# Altium PCB PCB1.PcbDoc
Units mm, origin at the board's own origin, x right, y up, seen from the top; angles counter-clockwise.
Board outline 86.9 x 32.8 mm, 2 copper layers (Top Layer, Bottom Layer); 10 components, 10 nets, 40 pads, 0 vias.
Unrouted connection lines stored in the file: 20.
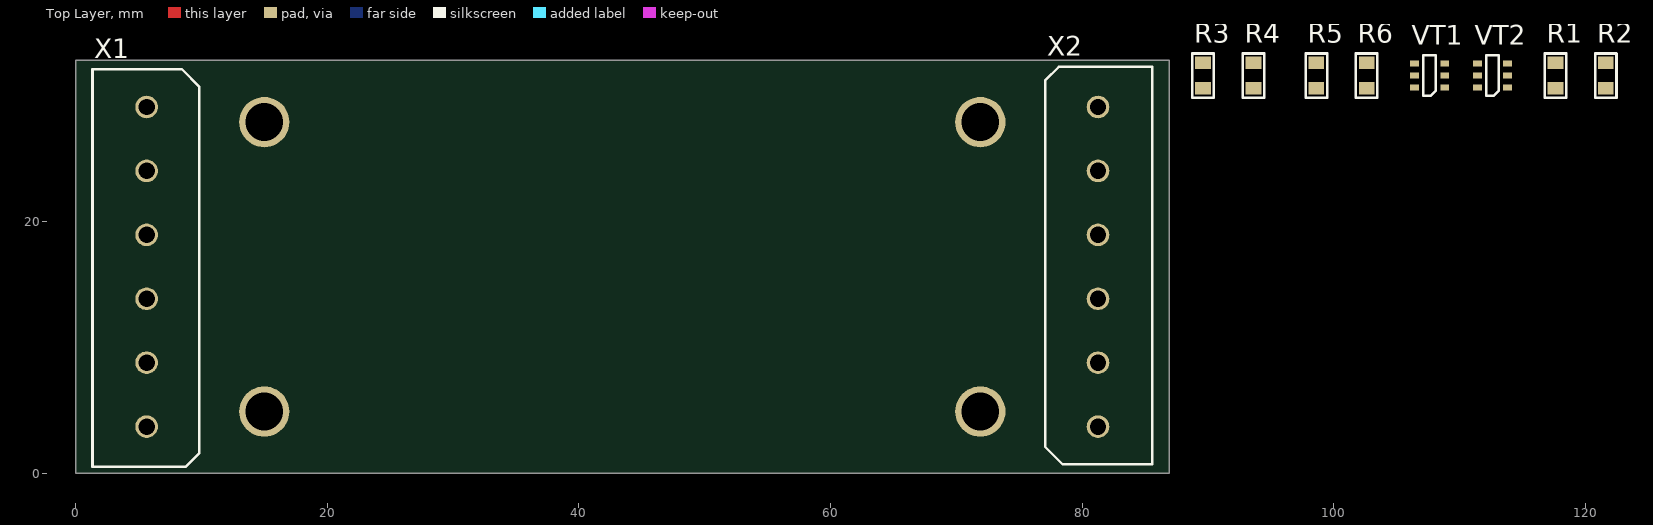
[diagram p0: Top Layer view]
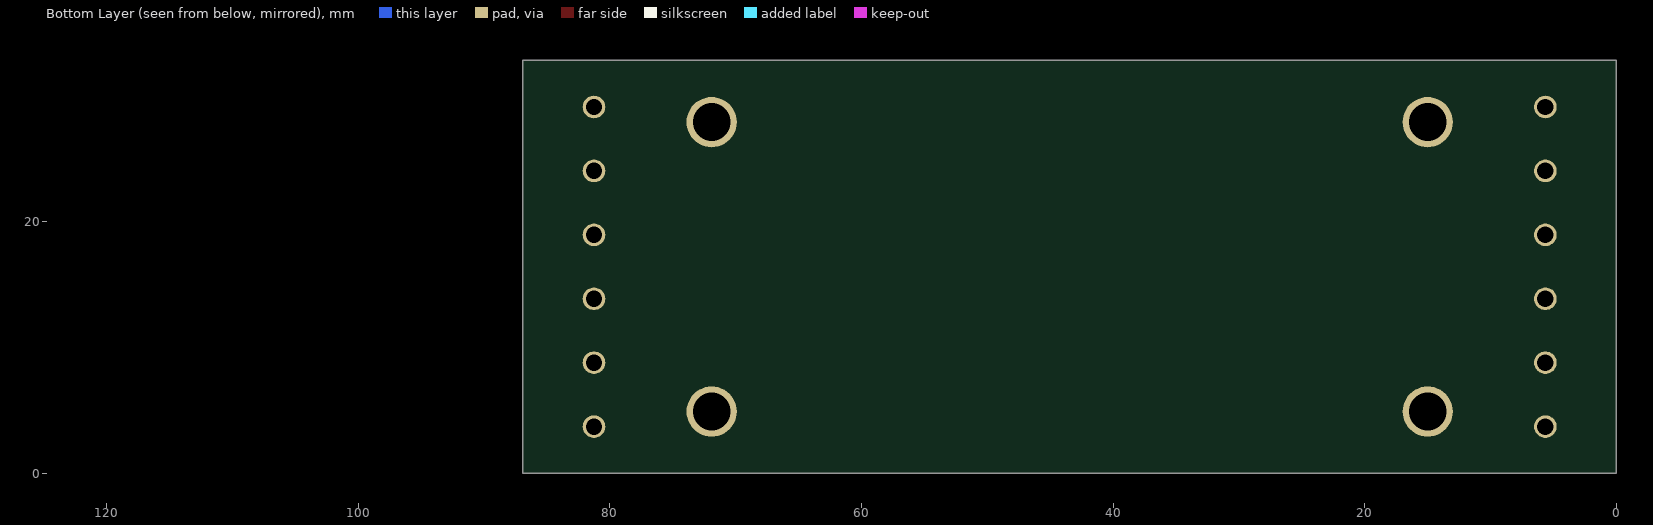
[diagram p1: Bottom Layer view, seen from below]

## Layer stack, top to bottom
Top Solder: solder mask 0.0102, Solder Resist, Dk 3.5
Top Layer: signal copper 0.0356
Dielectric 1: dielectric 0.32, FR-4, Dk 4.8
Bottom Layer: signal copper 0.0356
Bottom Solder: solder mask 0.0102, Solder Resist, Dk 3.5

## Board outline
0,0 86.9,0 86.9,32.8 0,32.8

## Design rules (kind name [scope] priority, off if disabled: settings)
Clearance [All] p1: gap=0.254 ignorepadtopadclearanceinfootprint=FALSE except(0: Arc-Hole Track-Hole SMDPad-Hole THPad-Hole Via-Hole Fill-Hole Poly-Hole Region-Hole Text-Hole)
PolygonConnect [All] p1: connectstyle=Relief reliefconductorwidth=0.254 reliefentries=4 polygonreliefangle="90 Angle" airgapwidth=0.254
RoutingVias [All] p1: holewidth=0.711 width=1.27 viastyle="Through Hole" minholewidth=0.711 minwidth=1.27 maxholewidth=0.711 maxwidth=1.27
SolderMaskExpansion [All] p1: expansion=0.102
Width [All] p1: maxlimit=0.254 minlimit=0.254 preferedwidth=0.254
30 further rules are at their usual default settings.

## Components (designator, comment, footprint, x,y, rotation, side; value= is the part's Value field where it differs from the comment)
R1 "5.6кОм" R0805 117.6,31.6 r90 top
R2 "5.6кОм" R0805 121.6,31.6 r90 top
R3 "4.3кОм" R0805 89.6,31.6 r90 top
R4 "4.3кОм" R0805 93.6,31.6 r90 top
R5 "4.3кОм" R0805 98.6,31.6 r90 top
R6 "4.3кОм" R0805 102.6,31.6 r90 top
VT1 "BC846DS" "6-LEAD TSOP" 107.6,31.6 r90 top
VT2 "BC846DS" "6-LEAD TSOP" 112.6,31.6 r90 top
X1 "398800306" "Molex 398800306" 5.65,16.4 r270 top locked
X2 "398800306" "Molex 398800306" 81.25,16.4 r90 top locked

## Footprints (in the part's own frame and the unit in brackets; to place one, negate y for a bottom-side part, rotate by r counter-clockwise, add the part's x,y. Pads: shape width x height; smd on the part's side, far side on the other; paste and mask are expansions set on the pad)
"6-LEAD TSOP" [mm]
  rect 0.45x0.7 smd: 1(-0.95,-1.2) 2(0,-1.2) 3(0.95,-1.2) 4(0.95,1.2) 5(0,1.2) 6(-0.95,1.2)
  silkscreen extent -1.6,-0.5 1.6,0.5, body extent -1.5,-1.4 1.5,1.4, height 1
"Molex 398800306" [mm]
  round 1.8 hole 1.3: 1(-12.7,0) 2(-7.62,0) 3(-2.54,0) 4(2.54,0) 5(7.62,0) 6(12.7,0)
  silkscreen extent -15.7,-4.3 15.9,4.2, body extent -15.44,-4.1 15.64,4.03, height 10.1
R0805 [mm]
  rect 1x1.25 smd: 1(-1,0) 2(1,0)
  silkscreen extent -1.75,-0.85 1.75,0.85, body extent -1,-0.63 1,0.63, height 0.43

## Part data
R1 R2 R3 R4 R5 R6: library part Resistor
X1 X2: library part "Connector 6-pin", "Connector"

## Free pads (board coordinates)
  round 4 hole 3: MP(15,4.9) MP(15,27.9) MP(71.9,4.9) MP(71.9,27.9)

## Nets (pads, with @x,y where several pads share a name; then routed paths per layer and width w, separated by ;. In a path a pad name is that pad's centre, name@x,y a point inside that pad or via, vN(x,y) a via of type N, cw(c..) or ccw(c..) an arc to the next point about the centre after c; other vN are vias at no path point)
+5V: R1.2 R2.2 X1.1
GND: R3.1 R4.1 R5.1 R6.1 X1.2
NetR1_1: R1.1 VT1.2 VT1.5 VT1.6
NetR2_1: R2.1 VT2.2 VT2.3 VT2.5
NetR3_2: R3.2 VT1.1
NetR4_2: R4.2 VT1.4
NetR5_2: R5.2 VT2.4
NetR6_2: R6.2 VT2.1
OUT1: VT1.3 X2.1 X2.2
OUT2: VT2.6 X2.3 X2.4
pads on no net: X1.3 X1.4 X1.5 X1.6 X2.5 X2.6

## Silkscreen, mask and mechanical layers (free items; w line width, h text height)
Mechanical 6:
  the board outline again, w0.2

## Dimensions
0,32.8 to 86.9,32.8 on Mechanical 6
0,0 to 0,32.8 on Mechanical 6